# Altium PCB PCB7_main_board.PcbDoc (part 2 of 3)
Units mm, origin at the board's own origin, x right, y up, seen from the top; angles counter-clockwise.
Board outline 169 x 112 mm, 2 copper layers (Top Layer, Bottom Layer); 286 components, 201 nets, 909 pads, 406 vias.
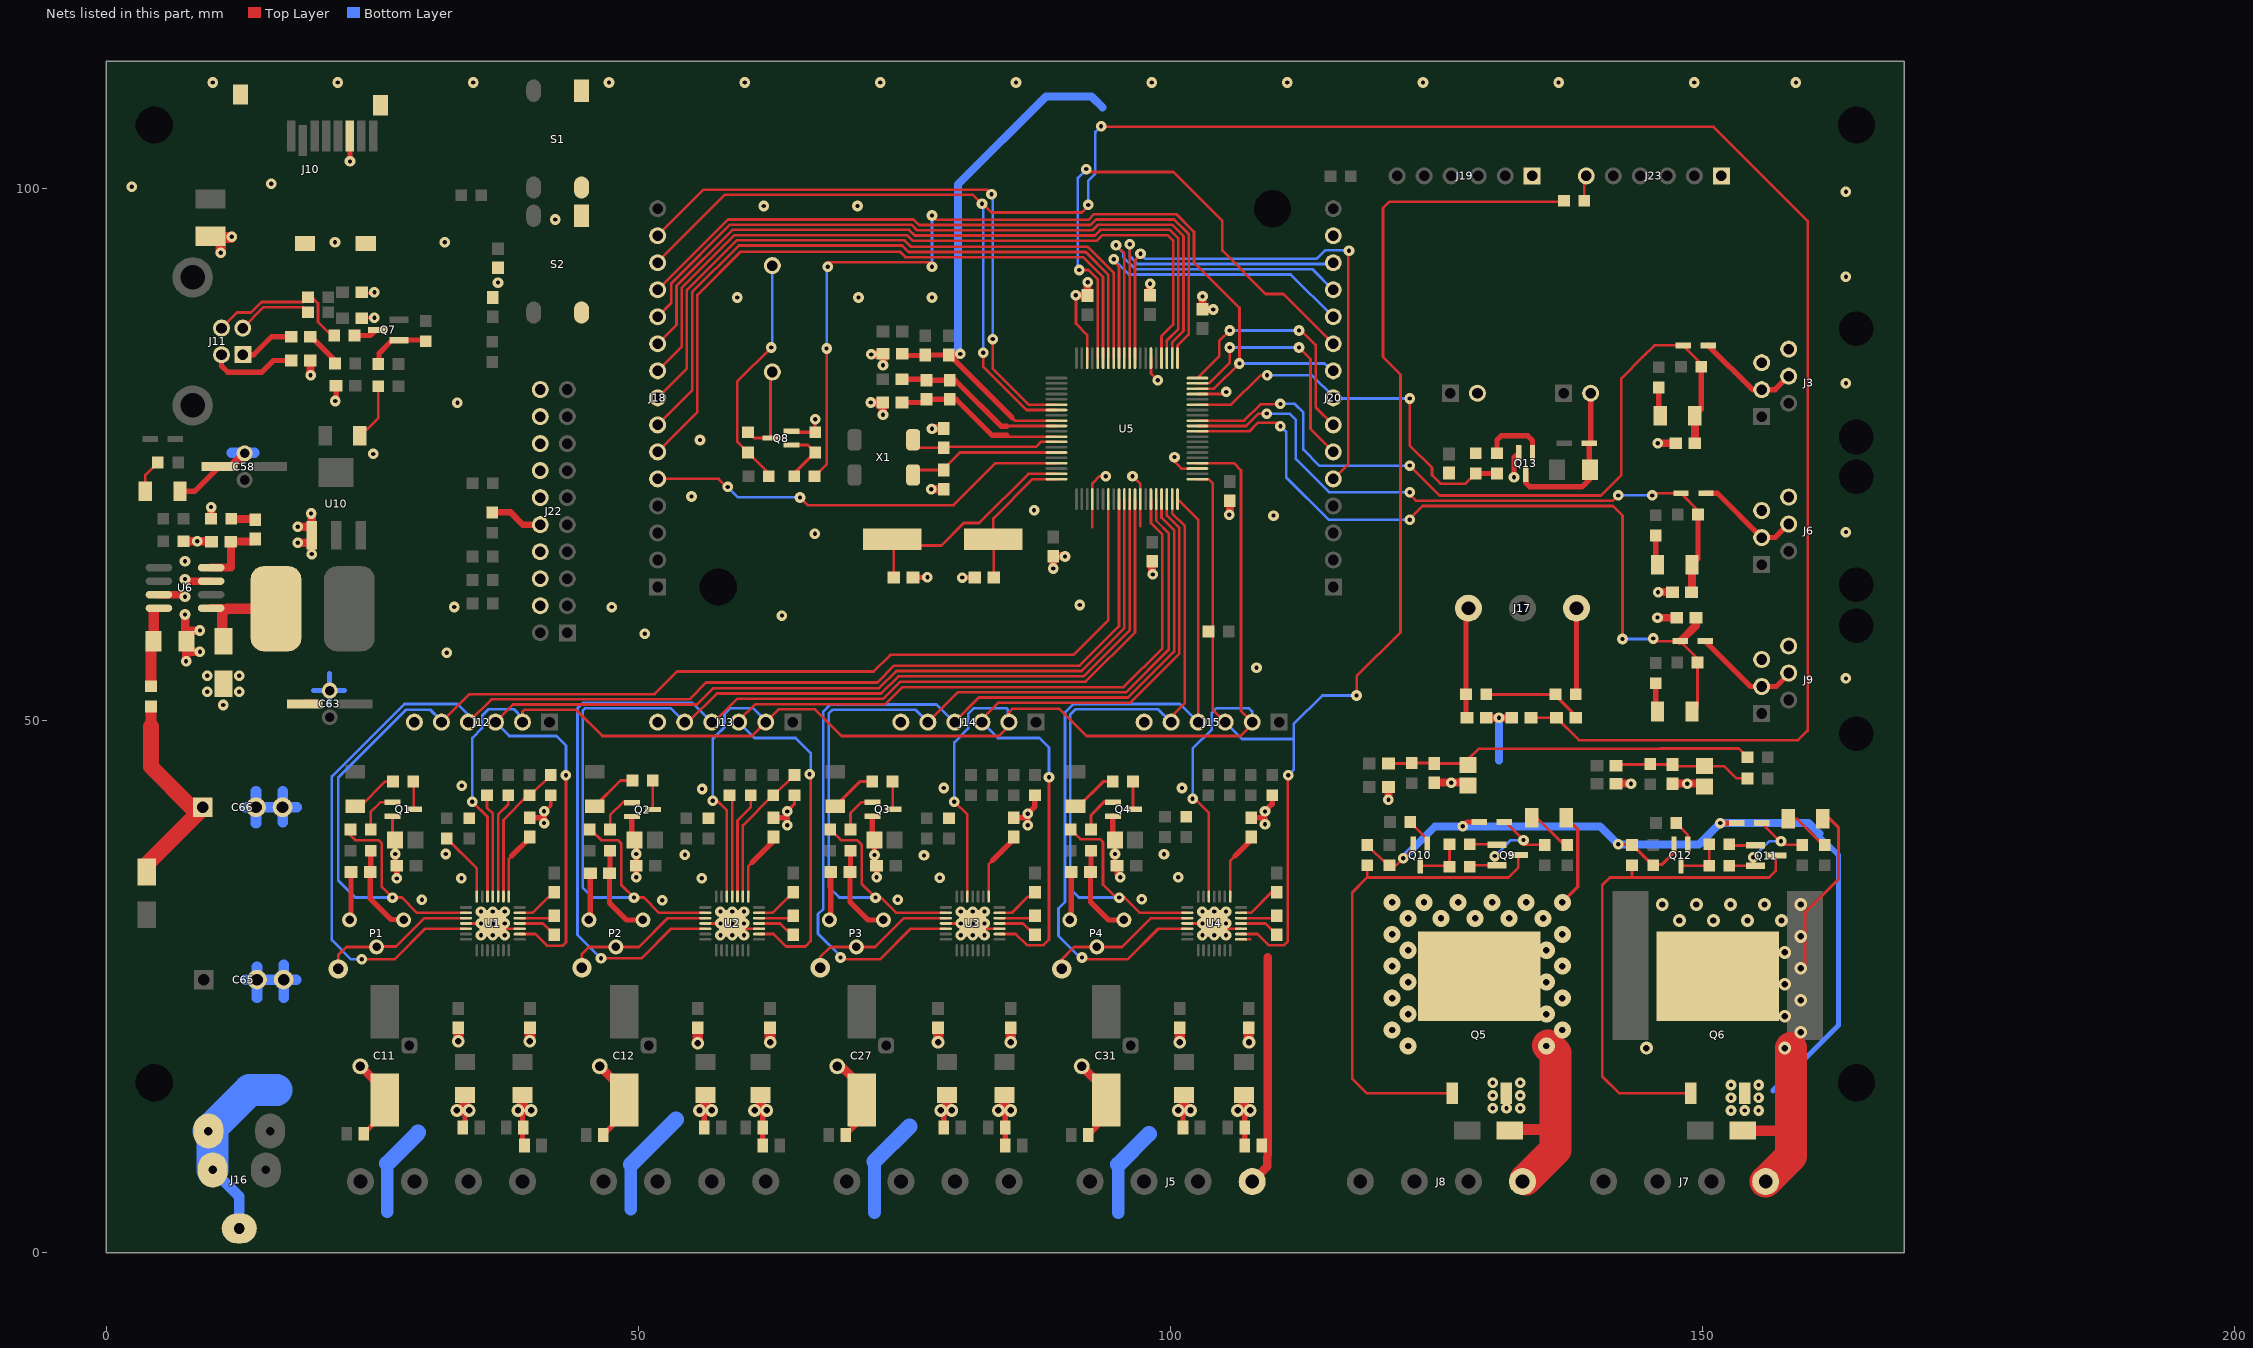
[diagram p2: the nets of this part, all layers, seen from the top]

## Via types
v1: diameter 1, hole 0.4, Top Layer to Bottom Layer, 276 vias
v2: diameter 1.2, hole 0.6, Top Layer to Bottom Layer, 59 vias
v3: diameter 1, hole 0.4, Top Layer to Bottom Layer, tented top, 36 vias
v4: diameter 1.6, hole 0.6, Top Layer to Bottom Layer, 27 vias
v5: diameter 1.8, hole 1, Top Layer to Bottom Layer, 4 vias
v6: diameter 1.6, hole 1, Top Layer to Bottom Layer, 2 vias
v7: diameter 1.7, hole 1.7, Top Layer to Bottom Layer, 2 vias

## Nets (pads, with @x,y where several pads share a name; then routed paths per layer and width w, separated by ;. In a path a pad name is that pad's centre, name@x,y a point inside that pad or via, vN(x,y) a via of type N, cw(c..) or ccw(c..) an arc to the next point about the centre after c; other vN are vias at no path point) (continued)
E1_MOTOR_2B: J5.4 R114.1 U4.1 | length 23
  Top Layer w0.25: U4.1@107.13,29.47 U4.1@106.653,29.47 107.512,29.47
  Top Layer w0.8: J5.4@107.7,6.708 109.1,8.108 109.151,10.075 109.151,27.813
EXP_AD1_P1.31: J18.5 U5.17 | length 40.1
  Top Layer w0.25: J18.5@51.82,72.748 57.552,72.748 58.3,72 v1(58.4,72) ; v1(65.2,71) 65.922,70.278 79.625,70.278 83.573,74.226 U5.17@89.307,74.226
  Bottom Layer w0.25: v1(58.4,72) 59.38,71.02 65.18,71.02 v1(65.2,71)
EXP_AD2_P0.25: C69.2 J18.13 L10.1 U5.7 | length 221.5
  Top Layer w0.25: J18.13@51.82,93.068 51.75,93.075 58.125,99.45 81.45,99.45 v1(82.3,98.6) 82.4,98.6 83.216,97.784 91.684,97.784 92.2,98.3 92.2,98.4 v1(92.3,98.5) ; v1@82.42,84.348 82.42,83.308 86.502,79.226 U5.7@89.307,79.226 ; v1(93.5,105.9) 93.555,105.845 151.055,105.845 159.9,97 159.9,49.1 159,48.2 138.4,48.2 L10.1@136.3,50.3 C69.2@133.9,50.3 C69.2@133.8,50.3
  Bottom Layer w0.25: v1(82.3,98.6) 82.42,98.48 v1(82.42,84.6) v1@82.42,84.325 ; v1(92.3,98.5) 92.3,100.784 92.965,101.449 92.965,105.365 v1(93.5,105.9)
EXP_AD3_AOUT_P0.26: J18.14 U5.6 | length 57.4
  Top Layer w0.25: J18.14@51.82,95.608 56.152,99.94 82.76,99.94 v1(83.2,99.5) ; v1(83.32,85.888) 83.32,83.101 86.695,79.726 U5.6@89.307,79.726
  Bottom Layer w0.25: v1(83.2,99.5) 83.32,99.38 83.32,98.425 ; v1(83.32,85.888) 83.32,98.425 ; 83.32,98.595 83.32,98.425
EXP_IO1_P1.15: J20.5 U5.69 | length 52.2
  Top Layer w0.25: U5.69@96.682,84.101 96.682,93.282 97.2,93.8 v1(97.2,93.9) ; J20.5@115.32,72.748 116.735,74.163 116.735,94.135 v1(116.8,94.2)
  Bottom Layer w0.25: v1(97.2,93.9) 97.666,93.434 113.752,93.434 114.551,94.233 116.767,94.233 v1(116.8,94.2)
EXP_IO2_P1.0: J20.10 U5.76 | length 51
  Top Layer w0.25: v1(91.45,92.388) 92.31,92.388 93.182,91.516 U5.76@93.182,84.101 ; v1(92.1,101.868) 92.368,101.6 100.293,101.6 104.9,96.993 104.9,94.2 108.966,90.134 110.634,90.134 J20.10@115.32,85.448
  Bottom Layer w0.25: v1@91.32,92.388 91.32,101.048 v1@92.12,101.848
EXP_IO3_P1.9: J20.11 U5.72 | length 32.5
  Top Layer w0.25: v1(94.7,93.4) 94.7,93.2 95.184,92.716 95.184,84.103 U5.72@95.182,84.101
  Bottom Layer w0.25: v1@94.8,93.3 v1(94.7,93.4) 94.964,93.136 96.136,91.964 111.311,91.964 115.275,88 J20.11@115.32,87.988
EXP_IO4_P1.10: J20.12 U5.71 | length 33.4
  Top Layer w0.25: v1(94.9,94.7) 95.682,93.918 U5.71@95.682,84.101
  Bottom Layer w0.25: v1(94.9,94.7) 95.565,94.035 95.565,93.619 96.729,92.454 113.346,92.454 J20.12@115.296,90.504 ; J20.12@115.296,90.504 115.325,90.475 J20.12@115.32,90.528 J20.12@115.296,90.504
EXP_IO5_P1.14: J20.13 U5.70 | length 31.5
  Top Layer w0.25: U5.70@96.182,84.101 96.182,94.8 v1(96.2,94.8)
  Bottom Layer w0.25: v1(96.2,94.8) 96.2,93.676 96.932,92.944 115.196,92.944 J20.13@115.276,93.024 ; J20.13@115.243,93.057 J20.13@115.276,93.024 ; J20.13@115.276,93.024 115.284,93.016 115.3,93 J20.13@115.32,93.068 J20.13@115.276,93.024
EXP_IO6_P1.1: J18.6 U5.75 | length 64.7
  Top Layer w0.25: J18.6@51.82,75.288 55.55,79.018 55.55,90.05 59.6,94.1 74.6,94.1 75.11,93.59 91.801,93.59 93.682,91.709 U5.75@93.682,84.101
EXP_IO7_P1.4: J18.7 U5.74 | length 63.7
  Top Layer w0.25: J18.7@51.82,77.828 55.06,81.068 55.06,90.295 59.45,94.685 74.795,94.685 75.4,94.08 92.004,94.08 92.024,94.06 92.057,94.06 94.182,91.935 U5.74@94.182,84.101
EXP_IO8_P1.8: J18.8 U5.73 | length 62.6
  Top Layer w0.25: J18.8@51.82,80.368 54.57,83.118 54.57,90.498 59.247,95.175 75.025,95.175 75.63,94.57 92.207,94.57 92.227,94.55 92.26,94.55 94.682,92.128 U5.73@94.682,84.101
EXP_MISO1_P0.8: J18.11 U5.62 | length 66.9
  Top Layer w0.25: J18.11@51.82,87.988 53.1,89.268 53.1,91.107 58.638,96.645 75.662,96.645 76.187,96.12 92.706,96.12 93.231,96.645 98.983,96.645 ; 98.984,96.644 100.164,96.644 101.247,95.562 101.247,86.647 100.182,85.582 U5.62@100.182,84.101
EXP_MOSI1_P0.9: J18.12 U5.61 | length 65.8
  Top Layer w0.25: J18.12@51.8,90.6 J18.12@51.892,90.6 ; J18.12@51.82,90.528 J18.12@51.892,90.6 ; U5.61@100.682,84.101 100.682,85.282 101.735,86.335 101.737,86.337 101.737,95.765 100.367,97.134 99.187,97.134 93.028,97.135 92.503,96.61 76.39,96.61 75.865,97.135 58.435,97.135 51.9,90.6 J18.12@51.892,90.6
EXP_PWM1_RXD1_P2.5: J20.6 U5.59 | length 22.9
  Top Layer w0.25: U5.59@102.557,81.726 102.567,81.736 103.66,81.736 105.6,83.676 v1(105.6,85.1) ; v1(112.1,85.1) 113.175,84.025 113.175,77.433 J20.6@115.32,75.288
  Bottom Layer w0.25: v1(105.6,85.1) v1(112.1,85.1)
EXP_PWM2_TXD1_P2.4: J20.7 U5.60 | length 22.6
  Top Layer w0.25: U5.60@102.557,82.226 104.6,84.269 104.6,85.7 v1(105.6,86.7) ; v1(112.1,86.7) 112.3,86.7 113.665,85.335 113.665,79.483 J20.7@115.32,77.828
  Bottom Layer w0.25: v1(105.6,86.7) v1(112.1,86.7)
EXP_PWM3_FAN_P2.3: J20.8 R11.1 R33.2 U5.55 | length 36.8
  Top Layer w0.25: U5.55@102.557,79.726 105.726,79.726 108.488,82.488 v1(109.1,82.488) ; v1(122.5,80.3) 122.5,75.9 124.6,73.8 124.6,73.1 125.4,72.3 127.75,72.3 R33.2@128.7,73.25
  Top Layer w0.5: R33.2@128.7,73.25 R11.1@130.7,73.25
  Bottom Layer w0.25: v1(109.1,82.488) 113.312,82.488 J20.8@115.32,80.48 ; J20.8@115.32,80.368 115.388,80.3 v1(122.5,80.3)
EXP_PWM4_BUZZER_P2.2: J20.9 R99.1 U5.58 | length 90.1
  Top Layer w0.25: R99.1@66.57,72.988 67.7,74.118 v1(67.7,85) ; v1(67.8,92.7) 67.8,93.1 77.6,93.1 v1(77.6,92.7) ; v1(77.6,97.5) 78,97.1 92.3,97.1 92.825,97.625 99.389,97.625 ; 99.39,97.624 100.57,97.624 102.227,95.968 102.227,93.094 106.5,88.821 106.5,85 v1(106.5,83.6) 104.126,81.226 U5.58@102.557,81.226
  Bottom Layer w0.25: v1(67.7,85) 67.7,93 67.8,93 v1(67.8,92.7) ; v1(77.6,92.7) 77.6,93.1 v1(77.6,97.5) ; v1(106.5,83.6) 107.9,83.6 114.5,83.6 115,83.1 115.128,83.1 J20.9@115.32,82.908
EXP_SCK1_P0.7: J18.10 U5.63 | length 68
  Top Layer w0.25: J18.10@51.82,85.448 53.59,87.218 53.59,90.904 58.841,96.155 75.459,96.155 75.984,95.63 92.909,95.63 93.434,96.155 98.78,96.155 ; 98.781,96.154 99.961,96.154 100.757,95.359 100.757,86.857 99.682,85.782 U5.63@99.682,84.101
EXP_SSEL1_P0.6: J18.9 U5.64 | length 69.1
  Top Layer w0.25: J18.9@51.82,82.908 54.08,85.168 54.08,90.701 59.044,95.665 75.256,95.665 75.781,95.14 93.112,95.14 93.637,95.665 98.577,95.665 ; 98.578,95.664 99.758,95.664 100.267,95.156 100.267,87.26 99.182,86.175 U5.64@99.182,84.101
GND: C3.1 C4.1 C5.1 C6.1 C7.2 C8.1 C9.1 C10.1 C11.2 C12.2 C15.1 C16.1 C17.1 C18.2 C21.1 C22.1 C23.1 C24.1 C25.1 C26.1 C27.2 C28.1 C29.1 C31.2 C33.1 C34.1 C35.1 C36.1 C42.1 C43.1 C44.1 C45.2 C46.2 C47.2 C48.2 C49.2 C52.2 C55.2 C56.2 C57.2 C58.2 C59.1 C60.1 C62.1 C63.2 C64.1 C65.2 C66.2 C67.1 C68.1 C70.1 C71.2 C72.2 C73.2 D12.2 D13.1 D17.2 D18.2 J3.5 J3.6 J6.5 J6.6 J9.5 J9.6 J10.6 J10.9 J12.6 J13.6 J14.6 J15.6 J16.2 J16.3 J16.5 J19.1 J20.14 J21.2 J22.4 J22.6 J22.8 J22.10 J22.12 J22.14 J22.16 J22.18 J22.20 J23.1 L6.1 L8.1 L12.2 P1.1 P2.1 P3.1 P4.1 Q1.2 Q2.2 Q3.2 Q4.2 Q5.3 Q6.3 Q8.2 Q10.2 Q12.2 Q13.2 R20.1 R21.1 R22.1 R23.1 R26.1 R27.1 R28.1 R29.1 R33.1 R34.2 R39.2 R40.2 R49.1 R50.1 R51.1 R52.1 R55.1 R56.1 R57.1 R58.1 R70.1 R71.1 R73.2 R78.2 R79.2 R80.2 R81.2 R82.2 R83.1 R92.1 R94.1 R95.1 R100.1 R102.1 R108.2 R109.2 R110.2 R111.2 R112.2 R113.2 R114.2 S1.1 S1.2 S2.1 S2.2 U1.3 U1.18 U1.29 U2.3 U2.18 U2.29 U3.3 U3.18 U3.29 U4.3 U4.18 U4.29 U5.24 U5.33 U5.43 U5.57 U5.66 U5.78 U6.3 U6.7 U10.1 | length 442.1
  Top Layer w0.25: C42.1@24,87.9 v1(25.2,87.9) ; C68.1@24,90.2 v1@25.2,90.2 ; v1@25.2,90.1 v1@25.2,90.2 ; Q1.2@26.9,41.05 26.9,39.05 C4.1@27.15,38.8 ; U1.18@33.803,30.97 v3(35.218,30.97) v3(36.328,30.97) 36.828,30.47 37.438,30.47 U1.3@38.853,30.47 ; U2.18@56.303,30.97 v3(57.718,30.97) v3(58.828,30.97) 59.328,30.47 59.938,30.47 U2.3@61.353,30.47 ; U3.18@78.903,30.97 v3(80.318,30.97) v3(81.428,30.97) 81.928,30.47 82.538,30.47 U3.3@83.953,30.47 ; v1@91.137,89.988 91.137,87.338 92.182,86.293 U5.78@92.182,84.101 ; 92.682,68.21 U5.24@92.682,70.851 92.682,72.332 93.352,73.002 v1(93.926,73.002) ; v1(96.448,73.002) 97.182,72.268 U5.33@97.182,70.851 97.182,68.31 ; U5.66@98.182,84.101 98.182,82.668 v1(98.825,82.025) ; v1(100.4,74.8) 100.4,74.375 101.059,73.716 U5.43@102.527,73.716 ; U4.18@101.603,30.97 v3(103.018,30.97) 104.128,30.97 104.628,30.47 U4.29@104.992,30.47 ; U5.57@102.557,80.726 105.026,80.726 v1@105.036,80.736 ; U4.29@104.638,30.46 U4.29@104.992,30.47 ; v1@105.075,80.775 v1@105.036,80.736 ; v1(105.25,80.925) 105.061,80.736 v1@105.036,80.736 ; U4.29@105.257,30.478 105.252,30.477 105.221,30.476 U4.29@104.992,30.47 ; U4.3@106.653,30.47 105.238,30.47 U4.29@104.992,30.47 ; R71.1@118.5,38.35 120.4,36.45 R92.1@120.6,36.45 121.25,36.45 v1(121.9,37.1) 122.85,38.05 Q10.2@122.85,38.4 ; v1@25.2,90.2 v1(25.2,90.3) v1@25.2,90.2
  Top Layer w0.3: v1@41.15,41.4 41.203,41.453 41.778,42.028 R28.1@41.778,43.02 ; v1(64,41.5) 64.678,42.178 R29.1@64.678,43.02 ; Q8.2@64.42,77.238 64.42,77.138 R100.1@66.62,77.138 66.62,78.345 v1(66.625,78.35) ; v1(142.1,38.4) 143.4,38.4 143.425,38.375 145.3,36.5 145.4,36.5 146.2,36.5 147.35,37.65 Q12.2@147.35,38.4
  Top Layer w0.5: D13.1@6.925,71.6 8.345,71.6 C58.2@10.645,73.9 ; v1(21.527,80.069) 21.6,80.143 C70.1@21.6,81.5 ; P1.1@22.86,31.34 23,31.48 C17.1@23,35.8 ; J10.6@22.878,104.97 22.911,104.937 v1(22.911,102.591) ; R34.2@24.2,11.2 26.178,13.178 C11.2@26.178,14.37 ; C4.1@27.15,38.8 v1(27.15,37.5) 27.15,36.55 C3.1@27.3,36.4 v1(27.3,35.2) ; R40.2@33.5,12 33.72,12.22 v2@33.72,13.4 ; R21.1@33.72,14.85 R21.1@33.72,14.9 ; v2@39.12,13.4 39.12,11.8 39.12,10.28 R80.2@39.3,10.1 ; R20.1@39.12,14.85 R20.1@39.12,15.25 ; C15.1@39.8,40.9 v1@41.15,40.9 ; v1(41.15,40.4) v1@41.15,40.9 ; v1@41.15,41.4 v1@41.15,40.9 ; P2.1@45.36,31.3 45.5,31.44 C18.2@45.5,35.7 ; R39.2@46.7,11.1 48.678,13.078 C12.2@48.678,14.37 ; Q2.2@49.4,41.02 49.4,39.05 C6.1@49.65,38.8 49.8,38.65 v1(49.8,37.5) C5.1@49.8,36.4 v1(49.8,35.3) ; v2(55.75,13.4) 56.2,13.4 R73.2@56.2,11.8 ; R81.2@61.7,10.1 R79.2@61.7,11.8 v2@61.7,13.4 ; C16.1@62.7,40.9 64,40.9 ; 63.4,40.9 64,40.9 ; v1(64,40.2) 64,40.9 ; v1(64,41.5) 64,40.9 ; P3.1@67.96,31.3 68.1,31.44 C35.1@68.1,35.8 ; R82.2@69.5,11.1 71,12.6 C27.2@71,14.37 ; Q3.2@72,41.05 72,39 C22.1@72.2,38.8 v1(72.2,37.4) 72.2,36.6 C21.1@72.4,36.4 v1(72.4,35.3) ; C55.2@75.82,63.488 77.163,63.488 v1(77.175,63.5) ; v2(78.427,13.4) 78.7,13.4 v2@78.7,13.36 ; R109.2@78.7,11.8 v2@78.7,13.36 ; v2@78.7,13.2 v2@78.7,13.36 ; v1(80.45,63.475) 81.607,63.475 C56.2@81.62,63.488 ; R113.2@84.5,10.1 R111.2@84.5,11.8 v2@84.5,13.4 ; C33.1@85.3,40.9 v1@86.3,40.9 ; v1(86.6,40.2) 86.6,40.857 86.557,40.9 v1@86.3,40.9 ; R56.1@87.278,43.02 87.278,41.955 v1(86.6,41.277) 86.6,41.2 v1@86.3,40.9 ; P4.1@90.56,31.3 90.7,31.44 C36.1@90.7,35.8 ; R108.2@92.3,11.1 93.978,12.778 C31.2@93.978,14.37 ; Q4.2@94.6,41.05 94.6,39 C24.1@94.8,38.8 v1(94.8,37.5) 94.8,36.6 C23.1@95,36.4 95,35.6 v1(95.3,35.3) ; v2(100.75,13.4) 101.2,13.4 R110.2@101.2,11.8 ; R114.2@107,10.1 R112.2@107,11.8 v2@107,13.4 ; C34.1@107.6,40.9 108.9,40.9 ; 108.3,40.9 108.9,40.9 ; v1(108.9,40.3) 108.9,40.9 ; R58.1@109.578,43.02 109.578,42.178 v1(108.9,41.5) 108.9,40.9 ; v1(127.5,40.1) 127.9,40.5 D17.2@129.025,40.5 ; v1(132.3,72.9) 132.3,74.75 Q13.2@132.75,75.2 ; v1(151.7,40.4) D18.2@153.225,40.4
  Top Layer w0.6: R83.1@36.27,69.598 38.002,69.598 39.152,68.448 J22.10@40.79,68.448
  Top Layer w0.7: U6.7@4.95,61.865 7.235,61.865 v1@7.4,61.7 ; v1@7.598,63.135 U6.3@9.85,63.135
  Top Layer w0.75: v1(7.4,63.333) v1@7.598,63.135 ; v1@19.15,82.8 19.178,82.828 L12.2@19.178,83.87 ; v2@33.77,13.4 v2@33.77,13.5 ; v1(89,64.325) C43.1@89,65.488 90.062,65.488 v1(90.1,65.45) ; v1(91.125,90) 91.137,89.988 C45.2@92.22,89.988 92.22,91.195 v1(92.25,91.225) ; C48.2@98.1,90 98.1,91.099 98.1,91.15 98.104,91.146 v1(98.104,91.099) ; C47.2@98.3,65 98.3,63.825 v1(98.35,63.775) ; v1(103.025,89.9) 103.02,89.895 C46.2@103.02,88.688 104.037,88.688 v1(104.05,88.675) ; v1(105.55,69.375) 105.6,69.425 C44.1@105.6,70.7 ; v1(145.796,59.715) 145.811,59.7 C73.2@147.6,59.7 ; v1(145.821,76.098) 145.823,76.1 C71.2@147.5,76.1 ; v1(145.847,62.103) 145.85,62.1 C72.2@147.2,62.1
  Top Layer w0.8: R102.1@7.25,66.9 v1(8.55,66.9) 9.85,66.9 C67.1@9.9,66.85 ; v1(7.4,60) 7.4,57.5 C64.1@7.5,57.5 ; v1(7.5,55.6) C64.1@7.5,57.5 ; v1(8.8,56.5) 7.55,56.5 C64.1@7.55,57.5 ; v1@8.9,58.5 v1(8.8,58.5) 7.55,58.5 C64.1@7.55,57.5 ; R95.1@9.85,69 v1(9.85,70.1) ; C58.2@10.645,73.9 11.75,73.9 C58.2@13,75.15 ; v1@10.9,51.5 v1(11,51.5) ; v1(18,66.75) U10.1@19.25,66.75 ; v1(18,68.25) U10.1@19.3,68.25 ; v1(19.25,69.5) 19.3,69.5 U10.1@19.3,68.25 ; v1(19.304,65.684) 19.25,65.738 U10.1@19.25,66.75 ; C11.2@23.878,17.54 26.178,15.24 C11.2@26.178,14.37 ; C12.2@46.378,17.54 48.678,15.24 C12.2@48.678,14.37 ; C27.2@69.078,17.54 71.378,15.24 C27.2@71.378,14.37 ; v1(71.85,79.925) 71.95,79.925 71.951,79.926 L6.1@72.982,79.926 72.982,78.793 v1(73,78.775) ; v1@71.9,84.425 L8.1@72.975,84.425 ; v1(73.003,83.424) v1@73.003,83.411 ; L8.1@73.025,84.467 73.025,83.499 73.006,83.423 v1@73.003,83.411 ; v1(77.525,71.775) 77.538,71.788 C52.2@78.72,71.788 ; v1(77.6,77.475) 77.613,77.488 C49.2@78.72,77.488 ; C31.2@91.678,17.54 93.978,15.24 C31.2@93.978,14.37 ; C64.1@7.5,57.5 C64.1@7.55,57.5 ; U10.1@19.25,66.75 19.3,66.75 U10.1@19.3,67.45 ; U10.1@19.25,66.75 19.25,67.45 U10.1@19.3,67.45 ; U10.1@19.3,67.45 U10.1@19.3,68.25 ; v1@73.003,83.411 73.003,83.403 73,83.4 v1@73.003,83.411
  Top Layer w1: C57.2@9.7,95.438 9.8,95.438 C57.2@10.758,95.438 ; v1(10.758,94) C57.2@10.758,95.438 ; v1(11.8,95.5) 11.738,95.438 C57.2@10.758,95.438 ; v2(32.95,13.4) 33.72,13.4 33.77,13.4 33.72,13.45 R21.1@33.72,14.85 ; v2(33.078,19.9) C8.1@33.078,21.17 ; v2@33.87,13.4 v2(34.1,13.4) ; R20.1@39.12,14.85 39.12,13.4 v2(39.925,13.4) ; v2@39.828,19.9 C7.2@39.828,21.17 ; C9.1@55.578,21.17 55.578,19.722 v2(55.6,19.7) ; v2@56.2,13.4 v2@56.32,13.4 ; R23.1@56.32,14.85 v2@56.32,13.4 ; v2(56.9,13.4) v2@56.32,13.4 ; v2(60.93,13.4) v2@61.5,13.4 ; R22.1@61.5,14.85 v2@61.5,13.4 ; v2(62.08,13.4) 61.7,13.4 v2@61.5,13.4 ; C10.1@62.378,21.17 62.378,19.822 v2(62.4,19.8) ; C25.1@78.178,21.17 78.178,19.822 78.189,19.811 v2@78.2,19.8 ; v2@78.7,13.4 v2@79.02,13.4 ; R50.1@79.02,14.85 v2@79.02,13.4 ; v2@79.451,13.36 79.56,13.36 79.56,13.4 v2(79.451,13.4) v2@79.02,13.4 ; v2(83.85,13.4) v2@84.42,13.4 ; R49.1@84.42,14.85 v2@84.42,13.4 ; v2(85,13.4) 84.5,13.4 v2@84.42,13.4 ; v2@85.02,19.82 v2(85,19.8) 85,21.15 C26.1@85.02,21.17 ; C29.1@100.878,21.17 100.878,19.822 v2(100.9,19.8) ; v2@101.2,13.4 v2@101.278,13.4 ; R52.1@101.278,14.85 v2@101.278,13.4 ; v2(101.9,13.4) v2@101.278,13.4 ; v2(106.327,13.4) 106.92,13.4 R51.1@106.92,14.85 ; v2@107,13.4 v2(107.5,13.4) ; C28.1@107.378,21.27 C28.1@107.378,21.17 107.378,19.822 v2(107.4,19.8)
  Bottom Layer w0.5: 19.482,52.857 C63.2@20.98,52.857 ; 20.98,51.613 20.98,52.85 C63.2@20.98,52.857 ; 20.98,54.432 C63.2@20.98,52.857 ; 22.377,52.857 21,52.857 C63.2@20.98,52.857 ; 156.65,15.25 162.8,21.4 162.8,37.4 160.9,39.3
  Bottom Layer w0.75: v1(121.9,37.1) 124.9,40.1 v1(127.5,40.1) 140.4,40.1 v1(142.1,38.4) 149.7,38.4 v1(151.7,40.4) 160,40.4 161,39.4
  Bottom Layer w1: J16.2@10,7.8 12.5,5.3 J16.5@12.5,2.3 ; 11.8,75.2 13,75.2 13.9,75.2 ; 13.07,25.688 C65.2@14.17,25.688 ; 13.07,41.888 C66.2@14.07,41.888 ; 14.07,40.388 C66.2@14.07,41.888 ; 14.07,43.388 C66.2@14.07,41.888 ; 14.17,23.988 C65.2@14.17,25.688 ; 14.17,26.888 C65.2@14.17,25.688 ; 16.57,40.488 C66.2@16.57,41.888 ; 16.57,43.388 C66.2@16.57,41.888 ; C66.2@16.6,41.9 17.9,41.9 ; 16.67,23.988 C65.2@16.67,25.688 ; 16.67,27.088 C65.2@16.67,25.688 ; 17.87,25.688 C65.2@16.67,25.688 ; C66.2@14.07,41.888 C66.2@16.57,41.888 ; C65.2@14.17,25.688 C65.2@16.67,25.688
  Bottom Layer w1.2: 26.4,3.9 26.4,8.4 ; 49.3,4.1 49.3,8.3 ; 72.2,3.8 72.2,8.6 ; 95.1,3.8 95.1,8.3
  Bottom Layer w1.5: 26.4,8.4 29.3,11.3 ; 49.3,8.3 53.537,12.537 ; 72.2,8.6 75.5,11.9 ; 95.1,8.3 98,11.2
  Bottom Layer w3: J16.2@10,7.8 10,11.05 J16.3@9.6,11.45 13.45,15.3 16,15.3
  other v1: 152.695,13.383 153.995,13.383 155.295,13.383 130.3,13.6 131.6,13.6 132.9,13.6 152.695,14.583 155.295,14.583 130.3,14.8 132.9,14.8 152.695,15.783 155.295,15.783 130.3,16 132.9,16 52.243,33.143 29.662,33.193 74.392,33.193 97.328,33.244 33.376,35.204 55.956,35.204 78.334,35.255 100.762,35.306 76.86,37.363 54.381,37.414 99.416,37.465 31.902,37.49 41.15,41.507 56,43.6 78.7,43.7 101.1,43.7 33.4,43.9 9.5,52.75 12.5,52.75 163.5,54 9.5,54.25 12.5,54.25 108.1,55 32,56.4 50.6,58.2 63.5,59.9 32.715,60.706 47.5,60.7 91.5,60.9 7.4,61.667 7.4,65 66.6,67.6 163.5,67.75 109.7,69.3 87.2,69.8 55,71.1 25.1,75.1 55.8,76.4 33,79.9 163.5,81.75 19.2,82.5 71.9,84.45 59.3,89.8 70.7,89.8 77.6,89.8 36.82,91.2 163.5,91.75 21.5,95 31.8,95 42.2,97.136 61.8,98.4 70.6,98.4 163.5,99.75 2.4,100.2 15.5,100.5 10,110 21.75,110 34.5,110 47.25,110 60,110 72.75,110 85.5,110 98.25,110 111,110 123.75,110 136.5,110 149.25,110 158.8,110
  other v2: 38.7,13.4 78.178,19.8 39.8,19.9
  other v3: 35.218,29.86 36.328,29.86 37.438,29.86 57.718,29.86 58.828,29.86 59.938,29.86 80.318,29.86 81.428,29.86 82.538,29.86 103.018,29.86 104.128,29.86 105.238,29.86 37.438,30.97 59.938,30.97 82.538,30.97 104.128,30.97 105.238,30.97 35.218,32.08 36.328,32.08 37.438,32.08 57.718,32.08 58.828,32.08 59.938,32.08 80.318,32.08 81.428,32.08 82.538,32.08 103.018,32.08 104.128,32.08 105.238,32.08
GND_A: C37.1 C38.1 C39.1 C40.1 C53.1 C54.1 C69.1 L3.1 L4.1 L8.2 L11.1 U5.9 | length 66.9
  Top Layer w0.25: 85.12,78.488 85.382,78.226 U5.9@89.307,78.226
  Top Layer w0.5: L8.2@74.8,84.35 C53.1@76.782,84.35 ; C53.1@77.032,84.4 79.232,84.4 85.12,78.512 85.12,78.488
  Top Layer w0.75: C54.1@79.232,84.4 80.15,84.4 v1(80.25,84.5) ; v1(120.5,42.6) L4.1@120.5,43.8 ; C39.1@124.8,44.2 v1(126.4,44.2) 127.75,44.2 C40.1@128,43.95 ; L11.1@129.6,50.3 L11.1@129.7,50.3 v1(130.9,50.3) C69.1@132.1,50.3 ; L3.1@141.9,44.1 v1(143.3,44.1) ; C37.1@147.2,44.1 v1(148.6,44.1) 149.95,44.1 C38.1@150.2,43.85
  Bottom Layer w0.75: v1(80.25,84.5) 80.031,84.719 80.031,100.408 88.323,108.7 92.6,108.7 93.65,107.65 ; 130.9,46.3 v1(130.9,50.3)
ME_DIR: J15.4 U4.19 U5.40 | length 70.9
  Top Layer w0.25: v1@91.4,27.6 v1@91.7,27.6 ; v1(91.7,27.77) 91.87,27.6 96,27.6 98.87,30.47 U4.19@101.603,30.47 ; U5.40@100.682,70.851 102.62,68.913 J15.4@102.62,49.888
  Bottom Layer w0.25: v1@91.53,27.77 89.495,29.805 89.495,32.395 90.1,33 90.1,50.793 90.907,51.6 100.908,51.6 J15.4@102.62,49.888
ME_EN: J15.3 R115.2 R116.1 U4.2 U5.41 | length 129.7
  Top Layer w0.25: U5.41@102.557,72.726 103.574,72.726 104,72.3 104,51.048 J15.3@105.16,49.888 ; U4.2@106.653,29.97 108.206,29.97 109.241,28.935 110.701,28.935 111.05,29.284 v1@111.05,44.85 ; v1@117.523,52.371 117.523,54.223 121.635,58.335 121.635,82.565 120,84.2 120,98.2 120.6,98.8 136.9,98.8 R116.1@137,98.9
  Bottom Layer w0.25: J15.3@105.16,49.888 106.748,48.3 111.6,48.3 ; v1(111.1,44.9) 111.6,45.4 111.6,48.3 ; v1(117.507,52.387) 114.287,52.387 111.6,49.7 111.6,48.3
ME_STEP: J15.5 R54.2 U4.16 U5.39 | length 70
  Top Layer w0.25: R54.2@90.65,39.8 91.565,38.885 93.415,38.885 93.685,38.615 93.685,34.615 94.9,33.4 v1(95.2,33.4) 95.708,33.4 97.138,31.97 U4.16@101.603,31.97 ; J15.5@100.08,49.888 100.08,50.38 101.37,51.67 101.37,68.309 100.182,69.497 U5.39@100.182,70.851
  Bottom Layer w0.25: v1(95.2,33.4) 91.4,33.4 90.6,34.2 90.6,50.6 91.1,51.1 98.868,51.1 J15.5@100.08,49.888
MN_RST: J12.2 J13.2 J14.2 J15.2 U1.12 U2.12 U3.12 U4.12 U5.44 | length 198.2
  Top Layer w0.25: v1@34.423,42.4 35.828,40.995 U1.12@35.828,33.495 ; J12.2@39.12,49.888 39.12,50.888 39.285,51.053 44.155,51.053 46.62,48.588 60.68,48.588 J13.2@61.98,49.888 63.18,51.088 66.62,51.088 69.12,48.588 83.92,48.588 84.84,49.508 84.84,50.808 85.19,51.158 89.55,51.158 92.12,48.588 106.62,48.588 107.7,49.668 J15.2@107.7,49.888 106.65,50.938 106.65,73.55 105.974,74.226 U5.44@102.557,74.226 ; v1(57,42.5) 57,42.62 57.28,42.62 58.328,41.572 U2.12@58.328,33.495 ; v1(79.7,42.4) 79.728,42.4 80.928,41.2 U3.12@80.928,33.495 ; v1(102.1,42.7) 102.282,42.7 103.628,41.354 U4.12@103.628,33.495
  Bottom Layer w0.25: v1(34.4,42.4) 34.4,48.4 35.32,49.32 35.32,50.488 35.932,51.1 38.3,51.1 39.12,50.28 J12.2@39.12,49.888 ; v1(57,42.5) 57,48.3 57.315,48.615 58.108,49.408 58.108,50.676 58.62,51.188 60.82,51.188 61.98,50.028 J13.2@61.98,49.888 ; v1(79.7,42.4) 79.7,47.988 81,49.288 81,50.668 81.52,51.188 84.62,51.188 84.72,51.088 84.72,50.461 84.35,50.091 J14.2@84.35,49.888 ; v1(102.1,42.7) 102.1,47.4 103.9,49.2 103.9,50.768 104.32,51.188 107.42,51.188 107.7,50.908 J15.2@107.7,49.888
MX_DIR: J12.4 U1.19 U5.29 | length 123.5
  Top Layer w0.25: v1(24,27.6) 27.1,27.6 29.97,30.47 U1.19@33.803,30.47 ; J12.4@34.04,49.888 36.185,52.033 54.8,52.033 56.385,53.618 72.478,53.618 74.05,55.19 91.465,55.19 95.148,58.873 95.148,58.907 ; 95.182,58.907 U5.29@95.182,70.851
  Bottom Layer w0.25: v1(24,27.6) 23,27.6 21.2,29.4 21.2,44.793 28.007,51.6 33,51.6 34.04,50.56 J12.4@34.04,49.888
MX_EN: J12.3 U1.2 U5.30 | length 105.8
  Top Layer w0.25: J12.3@36.58,49.888 38.235,51.543 55.522,51.543 57.056,53.076 72.629,53.076 74.253,54.7 91.668,54.7 95.638,58.67 95.638,58.714 ; U1.2@38.853,29.97 40.33,29.97 41.42,28.88 42.905,28.88 43.2,29.175 v1(43.2,44.9) ; 95.682,58.714 U5.30@95.682,70.851
  Bottom Layer w0.25: J12.3@36.58,49.888 37.88,48.588 42.312,48.588 43.2,47.7 v1(43.2,44.9)
MX_STEP: J12.5 R24.2 U1.16 U5.27 | length 124.2
  Top Layer w0.25: R24.2@22.95,39.8 22.95,39.25 23.4,38.8 25.6,38.8 25.9,38.5 25.9,34.4 v1(26.9,33.4) 27.789,33.4 29.219,31.97 31.502,31.97 U1.16@33.803,31.97 ; J12.5@31.5,49.888 34.135,52.523 51.523,52.523 53.651,54.651 72.125,54.651 73.644,56.17 73.694,56.22 90.92,56.22 94,59.3 94.182,59.482 U5.27@94.182,70.851
  Bottom Layer w0.25: v1(26.9,33.4) 23.4,33.4 21.8,35 21.8,44.7 28.153,51.053 30.447,51.053 31.35,50.15 31.35,49.738 31.5,49.588 31.8,49.588 J12.5@31.5,49.888
MY_DIR: J13.4 U2.19 U5.32 | length 104.8
  Top Layer w0.25: v1(46.5,27.695) 50.295,27.695 53.07,30.47 54.628,30.47 U2.19@56.303,30.47 ; J13.4@56.9,49.888 57.115,49.888 59.3,52.073 73.012,52.073 74.639,53.7 92.054,53.7 96.682,58.328 ; 96.682,58.318 96.682,58.328 ; U5.32@96.682,70.851 96.682,58.328
  Bottom Layer w0.25: v1(46.5,27.695) 44.295,29.9 44.295,51.195 44.8,51.7 55.088,51.7 J13.4@56.9,49.888 J13.4@56.888,49.888
MY_EN: J13.3 U2.2 U5.35 | length 88.4
  Top Layer w0.25: J13.3@59.44,49.888 59.44,50.023 61,51.583 73.215,51.583 74.812,53.18 95.619,53.18 99.26,56.821 99.26,67.506 98.182,68.584 U5.35@98.182,70.851 ; U2.2@61.353,29.97 62.73,29.97 63.9,28.8 65.7,28.8 66.2,29.3 v1@66.2,45
  Bottom Layer w0.25: J13.3@59.44,49.888 60.928,48.4 64.788,48.4 66.2,46.988 v1@66.2,45
  other v1: 66.1,45
MY_STEP: J13.5 R25.2 U2.16 U5.31 | length 106.2
  Top Layer w0.25: R25.2@45.45,39.8 45.52,39.8 46.52,38.8 48.1,38.8 48.4,38.5 48.4,34.6 v1(49.6,33.4) 50.522,33.4 51.952,31.97 U2.16@56.303,31.97 ; J13.5@54.36,49.888 54.688,49.888 57.383,52.583 72.829,52.583 74.446,54.2 91.861,54.2 96.18,58.519 96.18,60.409 96.182,60.411 U5.31@96.182,70.851
  Bottom Layer w0.25: v1(49.6,33.4) 45.7,33.4 44.785,34.315 44.785,50.992 44.981,51.188 53.06,51.188 J13.5@54.36,49.888
MZ_DIR: J14.4 U3.19 U5.37 | length 87.1
  Top Layer w0.25: v1(69,27.77) 69.17,27.6 72.7,27.6 75.57,30.47 U3.19@78.903,30.47 ; J14.4@79.76,49.888 79.76,49.96 82,52.2 96.025,52.2 100.36,56.535 100.36,67.933 99.182,69.111 U5.37@99.182,70.851
  Bottom Layer w0.25: v1(69,27.77) 69,27.895 66.895,30 66.895,31.841 67.4,32.346 67.4,50.9 68.043,51.543 78.032,51.543 79.687,49.888 J14.4@79.76,49.888 79.82,49.828 J14.4@79.728,49.828
MZ_EN: J14.3 U3.2 U5.38 | length 67.1
  Top Layer w0.25: J14.3@82.3,49.888 82.3,50.2 83.8,51.7 96.218,51.7 100.86,56.342 100.86,68.126 99.682,69.304 U5.38@99.682,70.851 ; U3.2@83.953,29.97 85.473,29.97 86.512,28.931 88.092,28.931 88.6,29.439 v1(88.6,44.7)
  Bottom Layer w0.25: J14.3@82.3,49.888 83.788,48.4 87.7,48.4 88.6,47.5 v1(88.6,44.7)
MZ_STEP: J14.5 R53.2 U3.16 U5.36 | length 87.4
  Top Layer w0.24: U5.36@98.682,70.851 98.682,68.818 99.87,67.63 99.87,67.3
  Top Layer w0.25: R53.2@68.05,39.8 69.05,38.8 70.566,38.8 71,38.366 71,34.7 v1(72.3,33.4) 72.797,33.4 74.217,31.98 78.893,31.98 U3.16@78.903,31.97 ; J14.5@77.22,49.888 80.022,52.69 95.822,52.69 99.87,56.738 99.87,67.3
  Bottom Layer w0.25: v1(72.3,33.4) 68.9,33.4 67.89,34.41 67.89,50.697 68.246,51.053 76.055,51.053 J14.5@77.22,49.888
NetC1_1: C1.1 U1.5 | length 3
  Top Layer w0.25: U1.5@38.853,31.47 41.778,31.47 C1.1@41.824,31.424
NetC1_2: C1.2 U1.4 | length 3.6
  Top Layer w0.25: U1.4@38.853,30.97 41.03,30.97 41.824,30.176 C1.2@41.824,29.9
NetC2_1: C2.1 U2.4 | length 3.7
  Top Layer w0.25: U2.4@61.353,30.97 63.33,30.97 64.4,29.9 C2.1@64.578,29.9
NetC2_2: C2.2 U2.5 | length 3
  Top Layer w0.25: U2.5@61.353,31.47 64.278,31.47 C2.2@64.313,31.435
NetC13_1: C13.1 U1.6 | length 3.8
  Top Layer w0.25: U1.6@38.853,31.97 40.07,31.97 41.57,33.47 C13.1@42.078,33.47
NetC14_1: C14.1 U2.6 | length 3.8
  Top Layer w0.25: U2.6@61.353,31.97 62.602,31.97 64.102,33.47 C14.1@64.578,33.47
NetC15_2: C15.2 U1.8 | length 6.4
  Top Layer w0.25: U1.8@37.828,33.495 37.828,37.028 38.1,37.3
  Top Layer w0.5: 38.1,37.3 39.8,39 C15.2@39.8,39.1
NetC16_2: C16.2 U2.8 | length 6.6
  Top Layer w0.25: U2.8@60.328,33.495 60.328,36.328 60.7,36.7
  Top Layer w0.5: 60.7,36.7 62.7,38.7 C16.2@62.7,39.1
NetC17_2: C17.2 P1.3 R18.1 | length 8.5
  Top Layer w0.5: R18.1@24.85,37.8 24.85,35.85 C17.2@24.8,35.8 24.8,33.3 26.76,31.34 P1.3@27.94,31.34
NetC18_1: C18.1 P2.3 R19.1 | length 8.9
  Top Layer w0.5: R19.1@47.3,37.65 R19.1@47.3,37.8 ; R19.1@47.35,37.8 47.35,35.75 C18.1@47.3,35.7 47.3,32.9 48.9,31.3 P2.3@50.44,31.3
NetC19_1: C19.1 U3.5 | length 3.1
  Top Layer w0.25: U3.5@83.953,31.47 86.978,31.47 C19.1@87.013,31.435
NetC19_2: C19.2 U3.4 | length 4.1
  Top Layer w0.25: U3.4@83.953,30.97 86.149,30.97 87.16,29.959 C19.2@87.16,29.488
NetC20_1: C20.1 U4.4 | length 3.8
  Top Layer w0.25: U4.4@106.653,30.97 108.93,30.97 C20.1@110,29.9
NetC20_2: C20.2 U4.5 | length 3.4
  Top Layer w0.25: U4.5@106.653,31.47 109.77,31.47 C20.2@110,31.7
NetC30_1: C30.1 U3.6 | length 3.9
  Top Layer w0.25: U3.6@83.953,31.97 85.102,31.97 86.602,33.47 C30.1@87.278,33.47
NetC32_1: C32.1 U4.6 | length 4.1
  Top Layer w0.25: U4.6@106.653,31.97 107.602,31.97 109.532,33.9 C32.1@110,33.9
NetC33_2: C33.2 U3.8 | length 6.6
  Top Layer w0.25: U3.8@82.928,33.495 82.928,36.528 83.3,36.9
  Top Layer w0.5: 83.3,36.9 85.3,38.9 C33.2@85.3,39.1
NetC34_2: C34.2 U4.8 | length 6.4
  Top Layer w0.25: U4.8@105.628,33.495 105.628,36.828 106.1,37.3
  Top Layer w0.5: 106.1,37.3 107.6,38.8 C34.2@107.6,39.1
NetC35_2: C35.2 P3.3 R47.1 | length 8.8
  Top Layer w0.25: R47.1@69.95,37.65 R47.1@69.95,37.8
  Top Layer w0.5: R47.1@69.95,37.8 69.95,35.85 C35.2@69.9,35.8 69.9,33 71.6,31.3 P3.3@73.04,31.3
NetC36_2: C36.2 P4.3 R48.1 | length 8.7
  Top Layer w0.5: R48.1@92.55,37.8 92.55,35.85 C36.2@92.5,35.8 92.5,33 94.2,31.3 P4.3@95.64,31.3
NetC37_2: C37.2 C38.2 L1.1 R59.1 R96.1 | length 13
  Top Layer w0.25: L1.1@141.9,45.9 R59.1@145.05,45.9 ; R59.1@145.1,45.95 R59.1@145.05,45.9 ; R96.1@154.25,44.6 153.2,44.6 152.05,45.75 C38.2@150.2,45.75 147.35,45.75 C37.2@147.2,45.9 R59.1@145.05,45.9
NetC39_2: C39.2 C40.2 L2.1 R44.1 R60.1 | length 35.3
  Top Layer w0.25: L2.1@120.5,46 122.65,46 R60.1@122.7,46.05 124.75,46.05 C39.2@124.8,46 127.85,46 C40.2@128,45.85 C40.2@128,46.4 ; C40.2@128,46.5 C40.2@128,46.4 ; R44.1@154.25,46.6 153.445,47.405 147.974,47.405 146.066,47.405 146.061,47.4 129,47.4 C40.2@128,46.4
NetC41_1: C41.1 D20.2 J24.2 Q13.3 | length 15.5
  Top Layer w0.5: Q13.3@133.4,73.2 133.4,72.4 133.8,72 138.7,72 139.45,72.75 C41.1@139.45,73.6 139.375,73.675 D20.2@139.375,76.1 139.51,76.235 J24.2@139.51,80.8
NetC49_1: C49.1 U5.13 X1.1 | length 14.1
  Top Layer w0.25: X1.1@75.645,76.238 76.195,75.688 C49.1@78.72,75.688 78.8,75.768 87.368,75.768 87.826,76.226 U5.13@89.307,76.226
NetC50_1: C50.1 C51.1 L6.2 U5.12 | length 16.1
  Top Layer w0.25: 84.62,76.841 84.735,76.726 U5.12@89.307,76.726
  Top Layer w0.5: L6.2@74.782,79.926 76.782,79.926 C50.1@77.082,80.226 C51.1@79.282,80.226 79.882,80.226 83.267,76.841 84.62,76.841
NetC50_2: C50.2 C51.2 L5.2 U5.10 | length 16.4
  Top Layer w0.25: 84.62,77.688 84.658,77.726 U5.10@89.307,77.726
  Top Layer w0.5: L5.2@74.782,82.126 76.982,82.126 C50.2@77.082,82.026 C51.2@79.282,82.026 79.782,82.026 84.12,77.688 84.62,77.688
NetC52_1: C52.1 U5.15 X1.4 | length 14.5
  Top Layer w0.25: X1.4@75.644,73.313 75.919,73.588 78.588,73.588 78.654,73.654 80.226,75.226 U5.15@89.307,75.226
NetC55_1: C55.1 U5.19 X2.2 | length 21.3
  Top Layer w0.25: C55.1@74.02,63.488 74.02,66.338 X2.2@73.92,66.438 ; U5.19@89.307,73.226 86.658,73.226 82.032,68.6 80.589,68.6 78.477,66.488 X2.2@73.92,66.488 ; X2.2@73.92,66.438 X2.2@73.92,66.488 ; X2.2@73.92,66.438 73.87,66.488 X2.2@73.92,66.488
NetC56_1: C56.1 U5.20 X2.1 | length 13
  Top Layer w0.25: C56.1@83.42,63.488 83.42,66.438 83.37,66.488 83.37,69.038 87.058,72.726 U5.20@89.307,72.726
NetC61_1: C61.1 R95.2 | length 2.4
  Top Layer w0.75: R95.2@11.75,69 14,69 C61.1@14,68.9
NetC61_2: C61.2 C67.2 U6.4 | length 6.7
  Top Layer w0.75: U6.4@9.85,64.405 11.7,64.405 C67.2@11.7,66.85 13.65,66.85 13.9,67.1 C61.2@14,67.1
NetC64_2: C64.2 F1.2 U6.8 | length 7.2
  Top Layer w1: F1.2@4.2,53.25 4.2,53.3 C64.2@4.2,57.5 ; C64.2@4.45,57.5 4.45,60.4 U6.8@4.5,60.4
NetC66_1: C66.1 D11.1 F1.1 | length 20.4
  Top Layer w1: 4.2,49.5 F1.1@4.2,51.35
  Top Layer w1.5: D11.1@3.8,35.8 3.8,36.518 9.07,41.788 C66.1@9.07,41.809 ; 4.2,49.5 4.2,45.7 8.091,41.809 C66.1@9.07,41.809 ; C66.1@9.07,41.888 C66.1@9.07,41.809
NetC71_1: C71.1 D1.1 D21.2 R64.1 U5.52 | length 73.6
  Top Layer w0.25: U5.52@102.557,78.226 106.933,78.226 108.46,79.753 v1@110.35,79.753 ; v1(122.5,74) 125.31,71.19 140.49,71.19 142.4,73.1 142.4,82.2 144.4,84.2 ; 144.7,84.5 144.4,84.2 ; R64.1@149.9,83.3 149.9,83.6 D21.2@148.2,85.3 145.5,85.3 144.4,84.2
  Top Layer w0.5: D1.1@149.295,78.688 149.9,79.293 R64.1@149.9,83.3
  Top Layer w0.75: D1.1@149.295,78.688 149.3,78.683 C71.1@149.3,76.1
  Bottom Layer w0.25: v1(110.35,79.8) 111.7,79.8 112.5,79 112.5,75.5 114,74 v1(122.5,74)
NetC72_1: C72.1 D4.1 D22.2 R97.1 U5.51 | length 62.1
  Top Layer w0.25: U5.51@102.557,77.726 107.126,77.726 108.288,78.888 v1(109.07,78.888) ; v1(122.5,71.5) 122.5,71.3 123.1,70.7 141.6,70.7 v1(142.1,71.2) ; v1(145.3,71.2) 145.5,71.4 D22.2@148,71.4 149.6,69.8 R97.1@149.6,69.4
  Top Layer w0.5: D4.1@149.045,64.688 149.6,65.243 R97.1@149.6,69.4
  Top Layer w0.75: C72.1@149,62.1 149.045,62.145 D4.1@149.045,64.688
  Bottom Layer w0.25: v1(109.07,78.888) 111.212,78.888 111.8,78.3 111.8,74.6 114.9,71.5 118.9,71.5 v1(122.5,71.5) ; v1(142.1,71.2) v1(145.3,71.2)
NetC73_1: C73.1 D7.1 D23.2 R104.1 U5.50 | length 74.5
  Top Layer w0.25: U5.50@102.557,77.226 102.56,77.223 107.423,77.223 108.213,78.013 110.045,78.013 v1(110.35,77.708) ; v1(122.5,68.9) 122.5,69 123.7,70.2 141.6,70.2 142.5,69.3 v1(142.5,57.7) ; v1@145.648,57.5 D23.2@147.925,57.5 149.55,55.875 R104.1@149.55,55.5 149.55,51.393 D7.1@149.045,50.888
  Top Layer w0.75: D23.2@147.925,57.5 149.4,58.975 C73.1@149.4,59.7
  Bottom Layer w0.25: v1(110.35,77.708) 110.9,77.158 110.9,72.9 114.9,68.9 v1(122.5,68.9) ; v1(142.5,57.7) v1@145.352,57.7
  other v1: 145.4,57.748
NetD1_2: D1.2 R13.1 | length 2.7
  Top Layer w0.5: R13.1@145.92,81.338 145.92,78.813 D1.2@146.045,78.688
NetD2_1: D2.1 R16.2 | length 4.5
  Top Layer w0.25: D2.1@23.4,41.975 23.875,41.975 26.2,44.3 R16.2@26.95,44.3
NetD3_1: D3.1 R17.2 | length 4.6
  Top Layer w0.3: D3.1@45.9,41.975 48.325,44.4 R17.2@49.45,44.4
NetD4_2: D4.2 R42.1 | length 2.8
  Top Layer w0.5: R42.1@145.62,67.438 145.62,64.863 D4.2@145.795,64.688
NetD5_1: D5.1 R46.2 | length 4.5
  Top Layer w0.3: D5.1@68.5,41.975 70.825,44.3 R46.2@72,44.3
NetD6_1: D6.1 R61.2 | length 4.5
  Top Layer w0.3: D6.1@91.1,41.975 91.375,41.975 93.7,44.3 R61.2@94.6,44.3
NetD7_2: D7.2 R45.1 | length 2.7
  Top Layer w0.5: R45.1@145.62,53.538 145.62,51.063 D7.2@145.795,50.888
NetD8_1: D8.1 D16.2 J7.4 Q6.2 | length 34.2
  Top Layer w0.3: v2@159.66,27 159.66,29.75 159.66,31.96 162.8,35.1 162.8,40 162,40.8 D8.1@161.325,40.8
  Top Layer w1: D16.2@153.8,11.5 158.241,11.5 158.341,11.6
  Top Layer w3: J7.4@155.96,6.708 158.341,9.089 158.341,11.6 v2@158.341,19.25
  other v2: 144.75,19.25 157.75,19.25 159.25,20.75 157.75,22.25 159.25,23.75 157.75,25.25 159.25,26.75 157.75,28.25 159.25,29.75 147.85,31.25 151.05,31.25 154.25,31.25 157.45,31.25 146.25,32.75 149.45,32.75 152.65,32.75 155.85,32.75 159.25,32.75
NetD8_2: D8.2 R66.1 | length 4.7
  Top Layer w0.25: D8.2@158.075,40.8 158.9,40.8 161.35,38.35 R66.1@161.5,38.35 R66.1@161.325,38.525
NetD9_1: D9.1 D15.2 J8.4 Q5.2 | length 28.5
  Top Layer w0.3: v4(136.85,32.95) 138.3,34.4 138.3,39.825 D9.1@137.225,40.9
  Top Layer w1: D15.2@131.9,11.6 136.2,11.6 137.2,11
  Top Layer w3: J8.4@133.4,6.9 136.2,9.7 136.2,11.6 136.2,18.8 v4@135.5,19.5
  other v4: 122.35,19.45 135.35,19.45 120.85,20.95 136.85,20.95 122.35,22.45 135.35,22.45 120.85,23.95 136.85,23.95 122.35,25.45 135.35,25.45 120.85,26.95 136.85,26.95 122.35,28.45 135.35,28.45 120.85,29.95 136.85,29.95 122.35,31.45 125.45,31.45 128.65,31.45 131.85,31.45 135.05,31.45 120.85,32.95 123.85,32.95 127.05,32.95 130.25,32.95 133.45,32.95
NetD9_2: D9.2 R67.1 | length 4.4
  Top Layer w0.25: D9.2@133.975,40.9 134.48,40.9 137.03,38.35 R67.1@137.3,38.35
NetD10_1: D10.1 R93.2 | length 5.2
  Top Layer w0.25: D10.1@23.825,77.4 24.5,77.4 25.57,78.47 R93.2@25.57,81.448
NetD12_1: D12.1 L13.1 U6.1 | length 9.4
  Top Layer w0.75: U6.1@9.85,60.595 11.719,60.595
  Top Layer w1: D12.1@10.9,57.45 10.9,57.5 U6.1@10.9,60.452 ; 11.379,60.528 L13.1@15.95,60.55
NetD13_2: D13.2 R98.1 | length 3.2
  Top Layer w0.25: D13.2@3.675,71.6 3.675,73.125 R98.1@4.85,74.3
NetD17_1: D17.1 Q9.2 R43.1 R65.2 | length 11.1
  Top Layer w0.25: R65.2@128.15,36.3 128.3,36.45 Q9.2@130.21,36.45 ; v1(130.5,37.3) 130.5,37.4 130.5,36.65 Q9.2@130.7,36.45 ; D17.1@131.375,40.5 131.5,40.5 v1(133.2,38.8) ; v1@133.2,38.35 R43.1@135.2,38.35
  Bottom Layer w0.25: v1(130.5,37.3) 132,38.8 v1(133.2,38.8)
NetD18_1: D18.1 Q11.2 R63.2 R106.1 | length 10.6
  Top Layer w0.25: R63.2@152.55,36.4 Q11.2@155,36.4 154.8,36.6 v1(154.8,37.2) ; D18.1@155.575,40.4 v1@157.275,38.7 ; v1@157.75,38.35 R106.1@159.4,38.35
  Bottom Layer w0.25: v1(154.8,37.2) 156.3,38.7 v1(157.4,38.7)
NetD21_1: D21.1 J3.3 J3.4 | length 9.8
  Top Layer w0.5: D21.1@150.55,85.3 154.715,81.135 J3.3@155.583,81.135 156.853,81.135 J3.4@158.123,82.405
NetD22_1: D22.1 J6.3 J6.4 | length 10
  Top Layer w0.5: D22.1@150.35,71.4 151.418,71.4 J6.3@155.583,67.235 156.853,67.235 J6.4@158.123,68.505
NetD23_1: D23.1 J9.3 J9.4 | length 10.2
  Top Layer w0.25: J9.3@155.583,53.235 J9.3@155.683,53.235
  Top Layer w0.5: D23.1@150.275,57.5 154.54,53.235 J9.3@155.583,53.235 ; J9.3@155.683,53.235 156.953,53.235 J9.4@158.173,54.455
NetJ11_1: J11.1 L9.1 | length 5.3
  Top Layer w0.5: J11.1@12.828,84.42 13.852,84.42 15.552,86.12 L9.1@17.378,86.12
NetJ11_2: J11.2 R90.1 | length 7.1
  Top Layer w0.25: J11.2@12.828,86.92 14.793,88.885 18.49,88.885 R90.1@18.95,88.425
NetJ11_3: J11.3 R87.1 R91.1 | length 14.3
  Top Layer w0.25: J11.3@10.828,86.92 12.3,88.392 13.608,88.392 14.59,89.375 18.5,89.375 R91.1@18.95,89.825 19.325,89.825 19.9,89.25 19.9,87.5 21.172,86.228 R87.1@21.43,86.228
NetJ11_4: J11.4 L12.1 | length 8.3
  Top Layer w0.5: J11.4@10.828,84.42 10.828,83.372 11.412,82.788 14.62,82.788 15.702,83.87 L12.1@17.378,83.87
NetJ17_1: J17.1 L11.2 R10.2 | length 10.4
  Top Layer w0.5: L11.2@127.9,50.3 127.8,50.4 R10.2@127.8,52.5 127.8,60.38 J17.1@128.02,60.6
NetJ17_3: J17.3 R5.2 | length 8.1
  Top Layer w0.5: R5.2@138.1,52.5 138.18,52.58 J17.3@138.18,60.6
NetJ23_6: J23.6 R116.2 | length 2.4
  Top Layer w0.25: R116.2@138.9,98.9 138.9,101.028 J23.6@139.1,101.228
NetL9_2: L9.2 R89.1 | length 3.2
  Top Layer w0.5: L9.2@19.178,86.12 19.23,86.12 R89.1@21.43,83.92
NetL10_2: L10.2 R5.1 R10.1 | length 9.5
  Top Layer w0.3: R10.1@129.8,52.4 129.9,52.5 R5.1@136.1,52.5 ; R5.1@136.2,52.5 R5.1@136.1,52.5 ; L10.2@138.1,50.3 138.1,50.5 R5.1@136.1,52.5
NetLS1_1: LS1.1 R84.2 R85.1 | length 22.4
  Top Layer w0.25: R85.1@62.25,73 62.25,73.308 R84.2@60.32,75.238 59.3,76.258 59.3,81.9 v1(62.5,85.1)
  Bottom Layer w0.25: v1(62.5,85.1) 62.6,85.2 LS1.1@62.6,92.8
NetLS1_2: LS1.2 Q8.3 R84.1 | length 8.8
  Top Layer w0.25: R84.1@60.32,77.138 60.87,76.588 Q8.3@62.42,76.588 ; Q8.3@62.52,76.688 Q8.3@62.42,76.588 ; LS1.2@62.6,82.8 62.42,82.62 Q8.3@62.42,76.588
NetP1_2: P1.2 U1.17 | length 15
  Top Layer w0.24: 29.9,31.47 U1.17@33.803,31.47
  Top Layer w0.25: v5@21.8,26.4 v5(21.8,26.7) 21.8,28 22.56,28.76 P1.2@25.4,28.76 ; P1.2@25.4,28.8 27.23,28.8 29.9,31.47
NetP2_2: P2.2 U2.17 | length 14.3
  Top Layer w0.25: v5(44.7,26.8) 44.7,28.1 45.36,28.76 P2.2@47.9,28.76 50.06,28.76 52.77,31.47 U2.17@56.303,31.47
NetP3_2: P3.2 U3.17 | length 14.3
  Top Layer w0.25: v5(67.1,26.8) 67.1,27.8 68.06,28.76 P3.2@70.5,28.76 72.26,28.76 74.97,31.47 U3.17@78.903,31.47
NetP4_2: P4.2 U4.17 | length 14.3
  Top Layer w0.25: v5(89.8,26.7) 89.8,27.6 90.96,28.76 P4.2@93.1,28.76 95.47,28.76 98.18,31.47 U4.17@101.603,31.47
NetQ1_1: Q1.1 R24.1 | length 4.1
  Top Layer w0.24: R24.1@24.85,39.8 24.85,41.45 25.75,42.35 Q1.1@26.9,42.35
NetQ1_3: Q1.3 R16.1 | length 2.6
  Top Layer w0.24: R16.1@28.85,44.3 28.9,44.25 Q1.3@28.9,41.7
NetQ2_1: Q2.1 R25.1 | length 4
  Top Layer w0.24: R25.1@47.35,39.8 47.35,41.15 48.6,42.4 49.32,42.4 Q2.1@49.4,42.32
NetQ2_3: Q2.3 R17.1 | length 2.8
  Top Layer w0.24: R17.1@51.35,44.4 51.35,41.72 Q2.3@51.4,41.67
NetQ3_1: Q3.1 R53.1 | length 4
  Top Layer w0.25: R53.1@69.95,39.8 69.95,41.35 70.95,42.35 Q3.1@72,42.35
NetQ3_3: Q3.3 R46.1 | length 2.6
  Top Layer w0.24: R46.1@73.9,44.3 73.9,41.8 Q3.3@74,41.7
NetQ4_1: Q4.1 R54.1 | length 3.9
  Top Layer w0.3: R54.1@92.55,39.8 92.55,41.15 93.8,42.4 94.55,42.4 Q4.1@94.6,42.35
NetQ4_3: Q4.3 R61.1 | length 2.6
  Top Layer w0.3: R61.1@96.5,44.3 96.5,41.8 Q4.3@96.6,41.7
NetQ5_1: Q5.1 Q9.3 R71.2 | length 46.4
  Top Layer w0.25: R71.2@118.5,36.45 118.5,35.285 ; Q5.1@126.5,15 118.5,15 117.1,16.4 117.1,33.9 117.115,33.9 118.5,35.285 ; Q9.3@132.7,37.4 132.7,36.2 131.785,35.285 118.5,35.285
NetQ6_1: Q6.1 Q11.3 R94.2 | length 46.5
  Top Layer w0.25: 143.4,35.285 R94.2@143.4,36.45 ; Q6.1@148.92,15 142.2,15 140.6,16.6 140.6,34.575 141.31,35.285 156.285,35.285 156.9,35.9 156.9,37.25 Q11.3@157,37.35
NetQ7_1: Q7.1 R15.1 R76.1 | length 5.6
  Top Layer w0.5: R76.1@25.63,83.92 25.63,84.548 26.88,85.798 Q7.1@27.52,85.798 29.92,85.798 R15.1@30.02,85.698
NetQ7_3: Q7.3 R87.2 | length 2.2
  Top Layer w0.5: R87.2@23.33,86.228 24.83,86.228 Q7.3@25.35,86.748
NetQ8_1: Q8.1 R99.2 R100.2 | length 5.5
  Top Layer w0.3: Q8.1@64.42,75.938 65.92,75.938 R100.2@66.62,75.238 64.67,73.288 R99.2@64.67,72.988
NetQ9_1: Q9.1 R62.2 | length 2.6
  Top Layer w0.25: R62.2@128.15,38.4 130.65,38.4 Q9.1@130.7,38.35
NetQ10_1: Q10.1 R69.2 | length 2.8
  Top Layer w0.25: R69.2@122.55,40.5 124.15,38.9 Q10.1@124.15,38.4
NetQ10_3: Q10.3 R62.1 R65.1 | length 4.9
  Top Layer w0.25: Q10.3@123.5,36.4 126.15,36.4 R65.1@126.25,36.3 R62.1@126.25,38.4
NetQ11_1: Q11.1 R107.2 | length 2.5
  Top Layer w0.25: R107.2@152.55,38.4 152.65,38.3 Q11.1@155,38.3
NetQ12_1: Q12.1 R68.2 | length 2.5
  Top Layer w0.25: R68.2@147.55,40.4 148.65,39.3 Q12.1@148.65,38.4
NetQ12_3: Q12.3 R63.1 R107.1 | length 4.7
  Top Layer w0.25: Q12.3@148,36.4 R63.1@150.65,36.4 R107.1@150.65,38.4
NetQ13_1: Q13.1 R11.2 | length 6.1
  Top Layer w0.5: R11.2@130.7,75.15 130.7,76.4 131.1,76.8 133.6,76.8 134.05,76.35 Q13.1@134.05,75.2
NetR1_1: R1.1 R28.2 U1.9 | length 13.4
  Top Layer w0.25: U1.9@37.328,33.495 37.328,40.696 39.652,43.02 R1.1@39.778,43.02 39.878,43.02 R28.2@41.778,44.92
NetR2_1: R2.1 U1.10 | length 9.9
  Top Layer w0.25: U1.10@36.828,33.495 36.828,41.196 37.778,42.146 R2.1@37.778,43.02
NetR3_1: R3.1 U1.11 | length 9.8
  Top Layer w0.25: R3.1@35.778,43.02 35.778,41.83 36.328,41.28 U1.11@36.328,33.495
NetR6_1: R6.1 U1.14 | length 6.6
  Top Layer w0.25: R6.1@32,38.95 34.828,36.122 34.828,35.38 U1.14@34.828,33.495
NetR7_1: R7.1 R29.2 U2.9 | length 13.5
  Top Layer w0.25: U2.9@59.828,33.495 59.828,40.188 59.846,40.188 R7.1@62.678,43.02 62.778,43.02 R29.2@64.678,44.92
NetR8_1: R8.1 U2.10 | length 10
  Top Layer w0.25: U2.10@59.328,33.495 59.328,40.648 60.578,41.898 R8.1@60.578,43.02
NetR9_1: R9.1 U2.11 | length 9.6
  Top Layer w0.25: R9.1@58.578,43.02 58.828,42.77 U2.11@58.828,33.495